# Altium PCB ORD_POT_PCB.PcbDoc
Units mm, origin at the board's own origin, x right, y up, seen from the top; angles counter-clockwise.
Board outline 90 x 35 mm, 2 copper layers (Top Layer, Bottom Layer); 5 components, 122 nets, 44 pads, 0 vias.
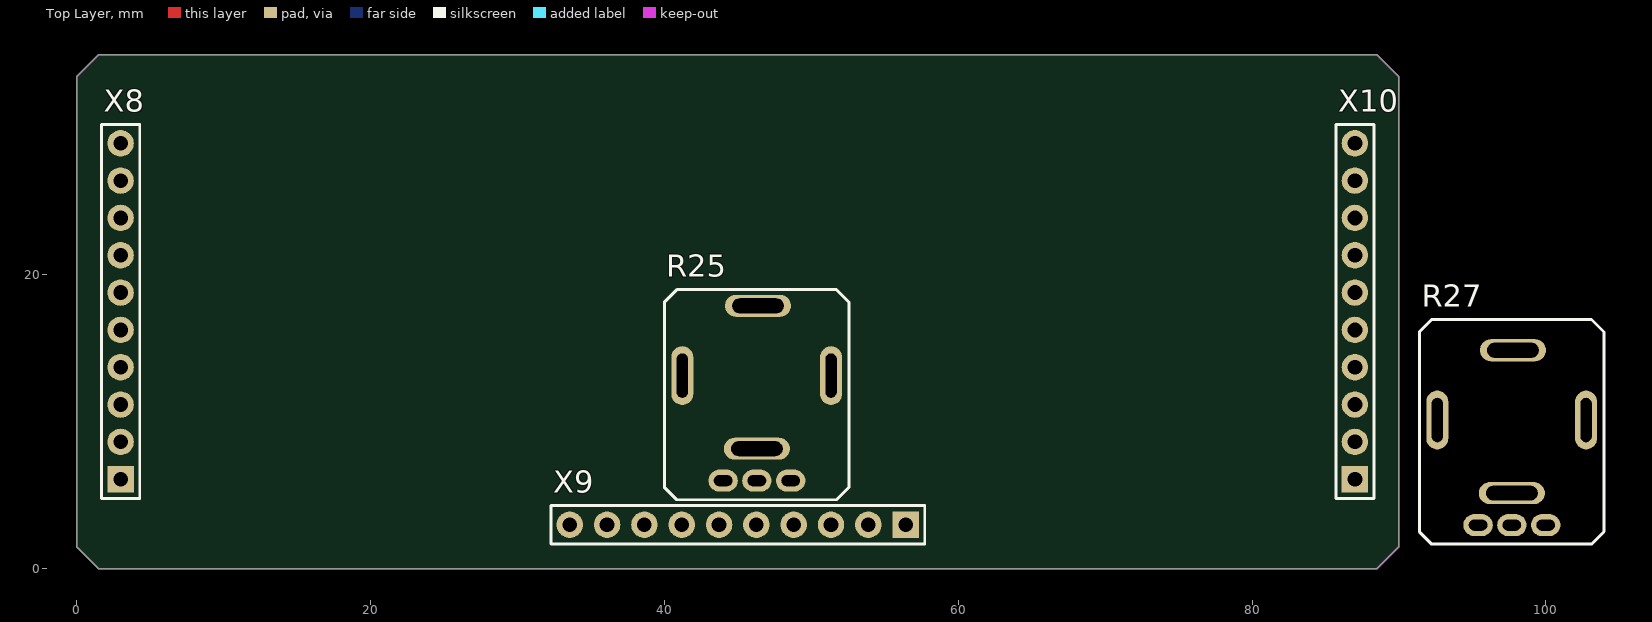
[diagram p0: Top Layer view]
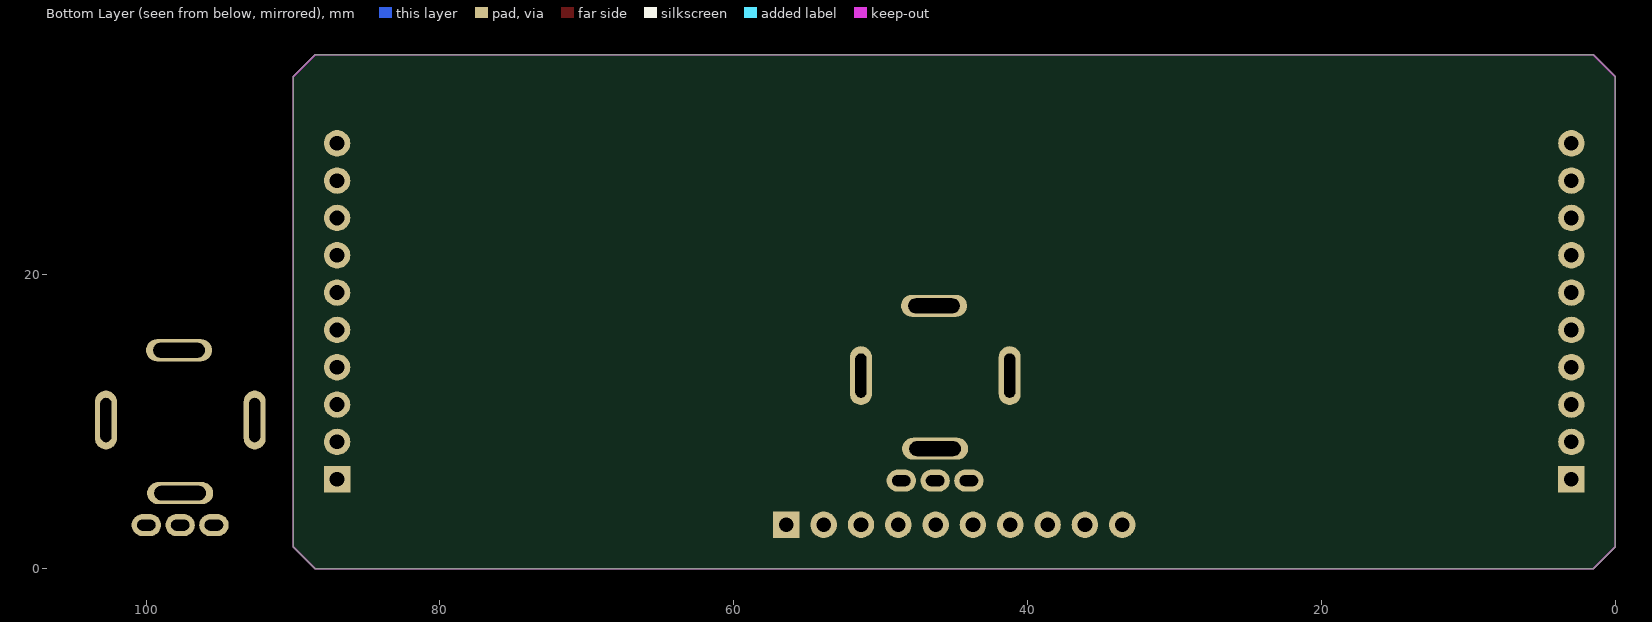
[diagram p1: Bottom Layer view, seen from below]

## Layer stack, top to bottom
Top Solder: solder mask 0.0102, Solder Resist, Dk 3.5
Top Layer: signal copper 0.0356
Dielectric 1: dielectric 0.32, FR-4, Dk 4.8
Bottom Layer: signal copper 0.0356
Bottom Solder: solder mask 0.0102, Solder Resist, Dk 3.5

## Board outline
0,1.5 0,33.5 1.5,35 88.5,35 90,33.5 90,1.5 88.5,0 1.5,0

## Design rules (kind name [scope] priority, off if disabled: settings)
Clearance [All] p1: gap=0.25 ignorepadtopadclearanceinfootprint=FALSE except(0: Arc-Hole Track-Hole SMDPad-Hole THPad-Hole Via-Hole Fill-Hole Poly-Hole Region-Hole Text-Hole)
PolygonConnect [All] p1: connectstyle=Relief reliefconductorwidth=0.254 reliefentries=4 polygonreliefangle="90 Angle" airgapwidth=0.254
RoutingVias [All] p1: holewidth=1 width=2 viastyle="Through Hole" minholewidth=0.7 minwidth=1.5 maxholewidth=10 maxwidth=10
SolderMaskExpansion [All] p1: expansion=0.102
Width [All] p1: maxlimit=3 minlimit=0.25 preferedwidth=0.25 minimp=50.000000 maximp=50.000000 favimp=50.000000
30 further rules are at their usual default settings.

## Components (designator, comment, footprint, x,y, rotation, side; value= is the part's Value field where it differs from the comment)
R25 "B50K" RK097 44,6 r0 top
R27 "B100K" RK097 95.381,2.976 r0 top
X8 "PLS10" PLS-10 3,6.1 r90 top
X9 "PLS10" PLS-10 56.425,3 r180 top locked
X10 "PLS10" PLS-10 87,6.1 r90 top

## Footprints (in the part's own frame and the unit in brackets; to place one, negate y for a bottom-side part, rotate by r counter-clockwise, add the part's x,y. Pads: shape width x height; smd on the part's side, far side on the other; paste and mask are expansions set on the pad)
PLS-10 [mm]
  rect 1.8x1.8 hole 1: 1(0,0)
  round 1.8 hole 1: 2(2.54,0) 3(5.08,0) 4(7.62,0) 5(10.16,0) 6(12.7,0) 7(15.24,0) 8(17.78,0) 9(20.32,0) 10(22.86,0)
  silkscreen extent -1.3,-1.3 24.13,1.3, body extent -1.27,-1.29 24.13,1.25, height 2.5
RK097 [mm]
  oval 2x1.5 hole 0.75 slot 1.25 at 0 deg: 1(0,0) 2(2.3,0) 3(4.6,0)
  oval 1.5x4 hole 0.75 slot 3 at 90 deg: 4(-2.775,7.15) 4(7.35,7.15)
  oval 4.5x1.5 hole 1 slot 3.5 at 0 deg: 4(2.3,2.175) 4(2.375,11.9)
  silkscreen extent -4,-1.3 8.57,13, body extent -3,-0.15 7.6,12.15, height 25.1

## Part data
R25 R27: library part RK097
X8 X9 X10: "2.54 mm"

## Nets (pads, with @x,y where several pads share a name; then routed paths per layer and width w, separated by ;. In a path a pad name is that pad's centre, name@x,y a point inside that pad or via, vN(x,y) a via of type N, cw(c..) or ccw(c..) an arc to the next point about the centre after c; other vN are vias at no path point)
3V3: 
3V3_USB: 
4V5_DBD: 
4V5_FV1: 
5V0: 
5V0_USB: 
9V0: 
CNTRL_0: 
CNTRL_1: 
CNTRL_2: 
GND: 
IN: 
IN_DELAY: 
IN_FV1: 
LFO: 
MOD: 
NetC1_1: 
NetC1_2: 
NetC2_1: 
NetC2_2: 
NetC3_2: 
NetC4_2: 
NetC5_2: 
NetC6_1: 
NetC6_2: 
NetC7_2: 
NetC8_1: 
NetC8_2: 
NetC9_1: 
NetC10_1: 
NetC10_2: 
NetC11_1: 
NetC11_2: 
NetC12_1: 
NetC12_2: 
NetC13_1: 
NetC13_2: 
NetC14_1: 
NetC14_2: 
NetC15_1: 
NetC16_2: 
NetC17_2: 
NetC18_1: 
NetC20_1: 
NetC20_2: 
NetC21_1: 
NetC22_1: 
NetC28_1: 
NetC28_2: 
NetC29_1: 
NetC29_2: 
NetC30_2: 
NetC31_1: 
NetC31_2: 
NetC32_1: 
NetC32_2: 
NetC33_1: 
NetC33_2: 
NetC34_1: 
NetC34_2: 
NetC35_2: 
NetC36_1: 
NetC37_2: 
NetC38_2: 
NetC39_1: 
NetC40_1: 
NetC42_2: 
NetC43_2: 
NetC44_2: 
NetD2_2: 
NetD4_1: 
NetDD1_1: 
NetDD1_27: 
NetDD2_10: 
NetDD2_13: 
NetDD2_16: 
NetDD2_17: 
NetDD5_6: 
NetDD6_3: 
NetDD6_5: 
NetDD6_6: 
NetR18_1: 
NetR24_2: 
NetR40_1: 
NetR42_1: 
NetX5_1: X8.1
NetX5_2: X8.2
NetX5_3: X8.3
NetX5_4: X8.4
NetX5_5: X8.5
NetX5_6: X8.6
NetX5_7: X8.7
NetX5_8: X8.8
NetX5_9: X8.9
NetX5_10: X8.10
NetX6_1: X9.1
NetX6_2: X9.2
NetX6_3: X9.3
NetX6_4: X9.4
NetX6_5: X9.5
NetX6_6: X9.6
NetX6_7: X9.7
NetX6_8: X9.8
NetX6_9: X9.9
NetX6_10: X9.10
NetX7_1: X10.1
NetX7_2: X10.2
NetX7_3: X10.3
NetX7_4: X10.4
NetX7_5: X10.5
NetX7_6: X10.6
NetX7_7: X10.7
NetX7_8: X10.8
NetX7_9: X10.9
NetX7_10: X10.10
OUT: 
OUT_DELAY: 
OUT_FV1: 
SCL: 
SDA: 
USB_N: 
USB_P: 
pads on no net: R25.1 R25.2 R25.3 R25.4 R27.1 R27.2 R27.3 R27.4

## Keep-outs
Keep-Out Layer:
  lines w0.1: 0,1.5 1.5,0 88.5,0 90,1.5 90,33.5 88.5,35 76.5,35 1.5,35 0,33.5 0,1.5